# EAGLE board LinCorrector2.old (EAGLE 7.4.0)
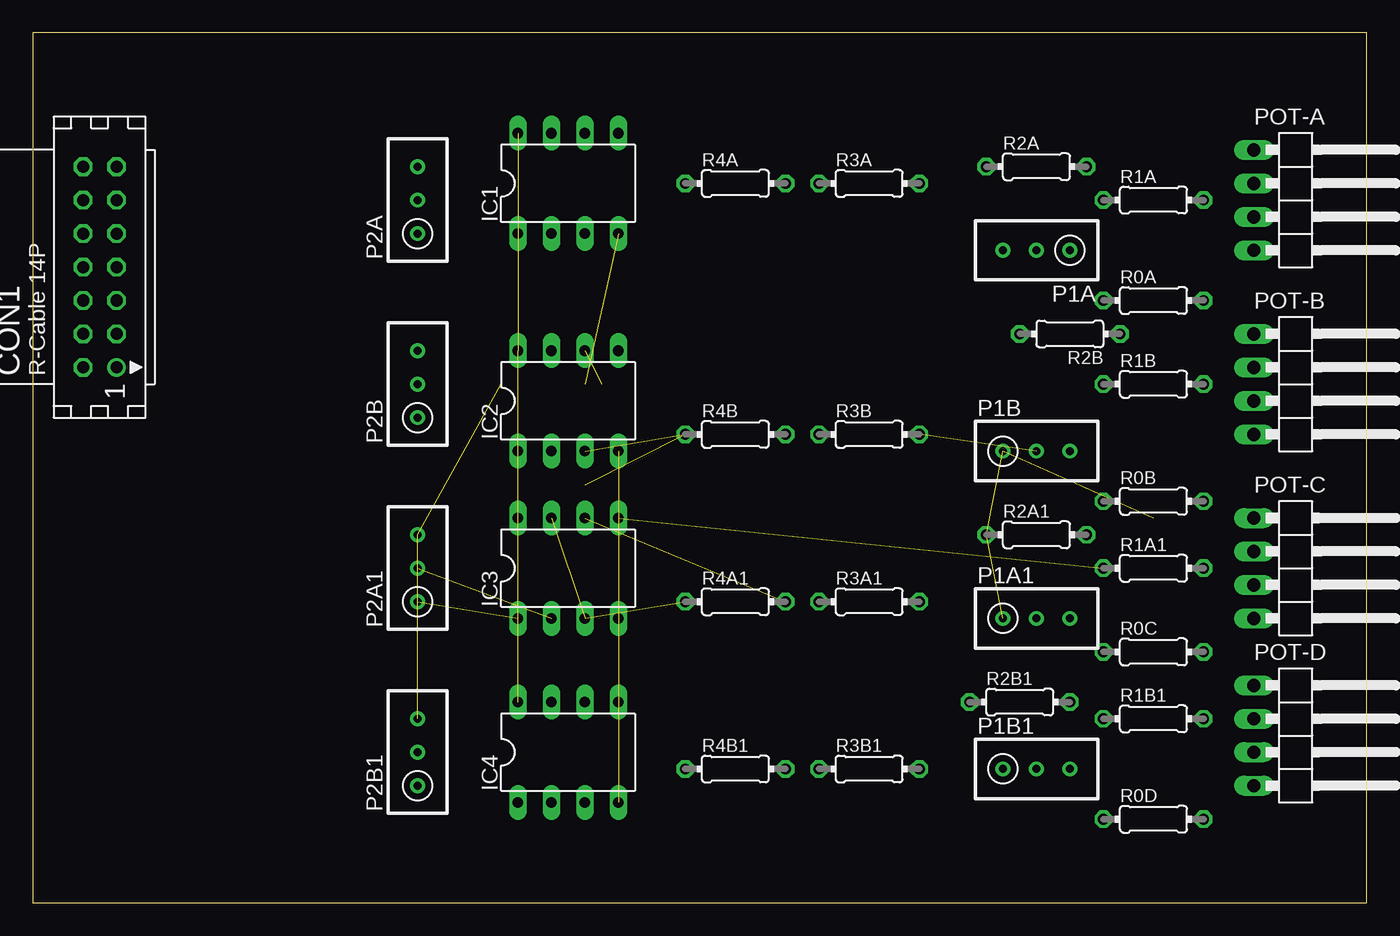
[diagram p0: board, top side]
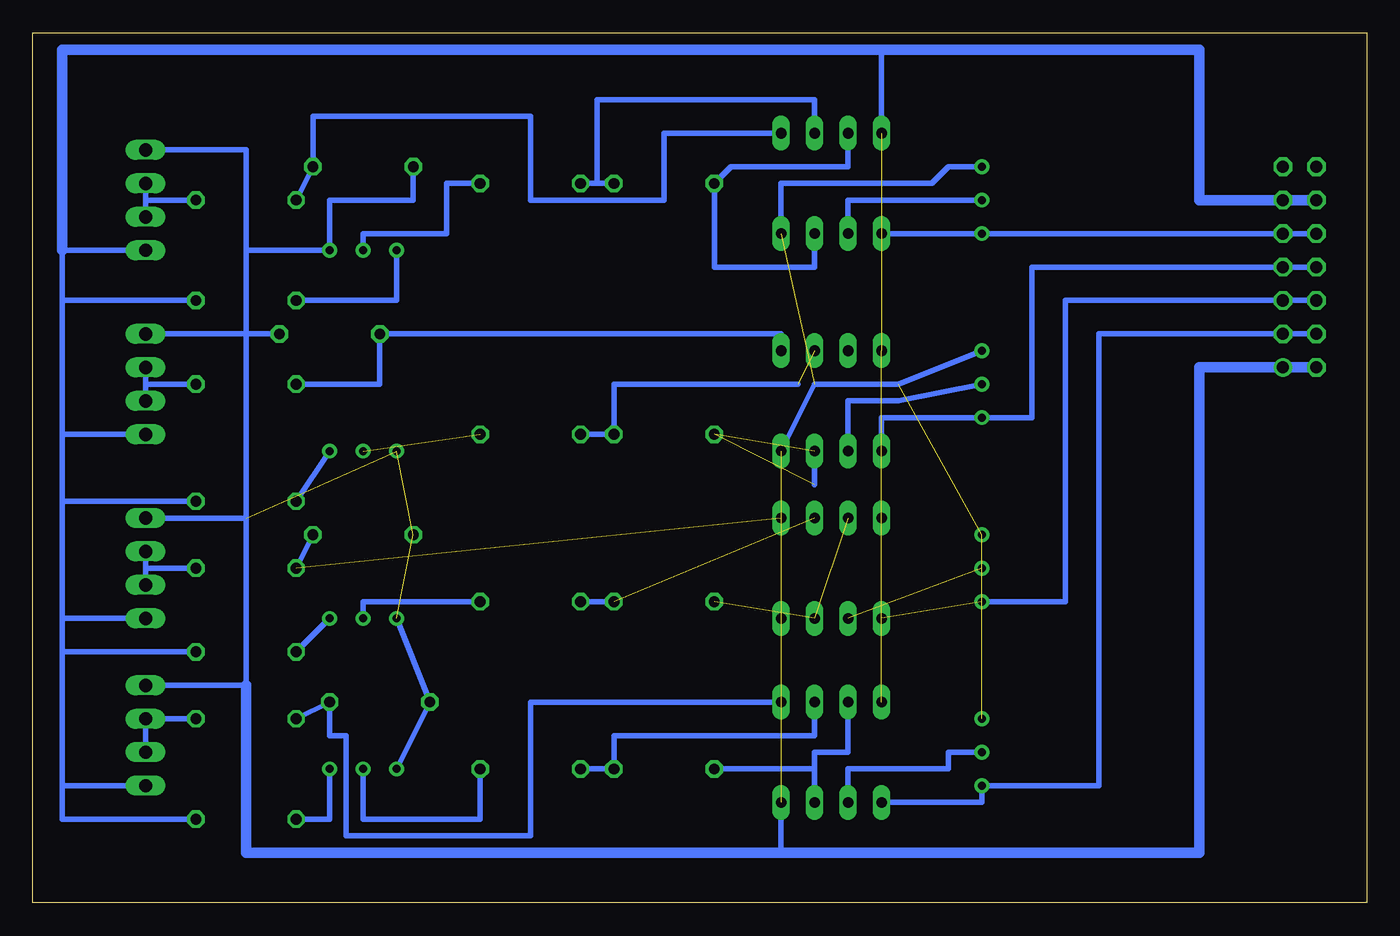
[diagram p1: board, bottom side, seen from below]

Size 101.27 x 66.03 mm. Coordinates in mm from the lower left corner, seen from the top.
Outline: 0,0 101.27,0 101.27,66.03 0,66.03 0,0
Copper layers (1*16): Top 0.035mm / dielectric 1.5mm / Bottom 0.035mm
Design rules "default": minimum track width 10mil, minimum drill 24mil, track to track 8mil, track to pad 8mil, pad to pad 8mil, via to via 8mil, smd to smd 8mil, copper to edge 40mil, drill to drill 8mil, minimum pad ring 10mil, minimum via ring 8mil, stop-mask expansion 4mil, vias tented up to drill 0mil, thermal gap 10mil
Net classes: 0 default: width 0.381 mm, drill 0.508 mm, clearance 0.381 mm

## Footprints (pad centres in the part's own frame; a part is rotated, then mirrored left to right if it is on the bottom)
CON14 = drill 0.914: 1 -7.62,-1.27 | drill 0.914 octagon: 2 -7.62,1.27; 3 -5.08,-1.27; 4 -5.08,1.27; 5 -2.54,-1.27; 6 -2.54,1.27; 7 0,-1.27; 8 0,1.27; 9 2.54,-1.27; 10 2.54,1.27; 11 5.08,-1.27; 12 5.08,1.27; 13 7.62,-1.27; 14 7.62,1.27
DIP-8 = drill 0.813 long: 1 -3.81,-3.81; 2 -1.27,-3.81; 3 1.27,-3.81; 4 3.81,-3.81; 5 3.81,3.81; 6 1.27,3.81; 7 -1.27,3.81; 8 -3.81,3.81
RTRIM3296W = drill 0.61: 1 0,-2.54; 2 0,0; 3 0,2.54
1X04/90 = drill 1.016 long: 1 -3.81,-3.81; 2 -1.27,-3.81; 3 1.27,-3.81; 4 3.81,-3.81
0204/7 = drill 0.813 octagon: 1 -3.81,0; 2 3.81,0

## Placement (x,y rotation side)
CON1  [CON14]  5.08,48.26 90 top
IC1  MCP6002DIP  [DIP-8]  40.64,54.61 0 top
IC2  MCP6002DIP  [DIP-8]  40.64,38.1 0 top
IC3  MCP6002DIP  [DIP-8]  40.64,25.4 0 top
IC4  MCP6002DIP  [DIP-8]  40.64,11.43 0 top
P1A  500k  [RTRIM3296W]  76.2,49.53 90 top
P1A1  500k  [RTRIM3296W]  76.2,21.59 270 top
P1B  500k  [RTRIM3296W]  76.2,34.29 270 top
P1B1  500k  [RTRIM3296W]  76.2,10.16 270 top
P2A  500k  [RTRIM3296W]  29.21,53.34 0 top
P2A1  500k  [RTRIM3296W]  29.21,25.4 0 top
P2B  500k  [RTRIM3296W]  29.21,39.37 0 top
P2B1  500k  [RTRIM3296W]  29.21,11.43 0 top
POT-A  [1X04/90]  96.52,53.34 270 top
POT-B  [1X04/90]  96.52,39.37 270 top
POT-C  [1X04/90]  96.52,25.4 270 top
POT-D  [1X04/90]  96.52,12.7 270 top
R0A  0  [0204/7]  85.09,45.72 0 top
R0B  0  [0204/7]  85.09,30.48 0 top
R0C  0  [0204/7]  85.09,19.05 0 top
R0D  0  [0204/7]  85.09,6.35 0 top
R1A  10k  [0204/7]  85.09,53.34 0 top
R1A1  10k  [0204/7]  85.09,25.4 0 top
R1B  10k  [0204/7]  85.09,39.37 0 top
R1B1  10k  [0204/7]  85.09,13.97 0 top
R2A  10k  [0204/7]  76.2,55.88 0 top
R2A1  10k  [0204/7]  76.2,27.94 0 top
R2B  10k  [0204/7]  78.74,43.18 180 top
R2B1  10k  [0204/7]  74.93,15.24 0 top
R3A  10k  [0204/7]  63.5,54.61 0 top
R3A1  10k  [0204/7]  63.5,22.86 0 top
R3B  10k  [0204/7]  63.5,35.56 0 top
R3B1  10k  [0204/7]  63.5,10.16 0 top
R4A  10k  [0204/7]  53.34,54.61 0 top
R4A1  10k  [0204/7]  53.34,22.86 0 top
R4B  10k  [0204/7]  53.34,35.56 0 top
R4B1  10k  [0204/7]  53.34,10.16 0 top

## Library data of the parts
CON1 = con-harting; OC_FARNELL: unknown; OC_NEWARK: unknown
IC1-IC4 = adam - ics
P1A P1A1 P1B P1B1 P2A P2A1 P2B P2B1 R0A R0B R0C R0D = resistor
POT-A POT-B POT-C POT-D = pinhead
R1A R1A1 R1B R1B1 R2A R2A1 R2B R2B1 R3A R3A1 R3B R3B1 R4A R4A1 R4B R4B1 = rcl

## Nets
GND: CON1.1 CON1.2 IC1.4 IC2.4 IC3.4 IC4.4 P1A1.1 P1A.1 P1B1.1 P1B.1 P2A1.3 P2A.3 P2B1.3 P2B.3 POT-A.1 POT-B.1 POT-C.1 POT-D.1 R2A1.1 R2A.1 R2B1.1 R2B.1
N$1: IC1.5 R1A.1 R2A.2
N$2: POT-A.2 POT-A.3 R1A.2
N$3: P1A.2 R3A.2
N$4: IC1.6 R3A.1 R4A.2
N$5: IC1.3 IC1.7 R4A.1
N$6: IC2.5 R1B.1 R2B.2
N$7: IC1.2 P2A.2
N$8: CON1.9 CON1.10 IC1.1 P2A.1
N$9: P1B.2 R3B.2
N$10: IC2.6 R3B.1 R4B.2
N$11: IC2.3 IC2.7 R4B.1
N$12: IC2.2 P2B.2
N$13: CON1.7 CON1.8 IC2.1 P2B.1
N$14: POT-B.2 POT-B.3 R1B.2
N$15: IC3.5 R1A1.1 R2A1.2
N$16: P1A1.2 R3A1.2
N$17: IC3.6 R3A1.1 R4A1.2
N$18: IC3.3 IC3.7 R4A1.1
N$19: IC3.2 P2A1.2
N$20: CON1.5 CON1.6 IC3.1 P2A1.1
N$21: POT-C.2 POT-C.3 R1A1.2
N$22: IC4.5 R1B1.1 R2B1.2
N$23: P1B1.2 R3B1.2
N$24: IC4.6 R3B1.1 R4B1.2
N$25: IC4.3 IC4.7 R4B1.1
N$26: IC4.2 P2B1.2
N$27: P1A.3 R0A.1
N$28: POT-D.2 POT-D.3 R1B1.2
N$29: CON1.3 CON1.4 IC4.1 P2B1.1
N$30: P1B.3 R0B.1
N$31: P1A1.3 R0C.1
N$32: P1B1.3 R0D.1
VCC: CON1.11 CON1.12 IC1.8 IC2.8 IC3.8 IC4.8 POT-A.4 POT-B.4 POT-C.4 POT-D.4 R0A.2 R0B.2 R0C.2 R0D.2

## Tracks (layer width: path | path; a pad name or v marks a point on that pad's centre or on a via)
GND  (8 unrouted)
  Bottom 0.406: POT-A.1 85.09,57.15 85.09,49.53 | 85.09,49.53 85.09,43.18 | 85.09,43.18 85.09,29.21 | 85.09,29.21 85.09,16.51 POT-D.1 | POT-C.1 85.09,29.21 | POT-B.1 85.09,43.18 | P2A.3 31.75,55.88 33.02,54.61 44.45,54.61 IC1.4 | R2A.1 72.39,53.34 78.74,53.34 P1A.1 85.09,49.53 | R2B.1 85.09,43.18 | IC4.4 44.45,3.81 | P1B1.1 R2B1.1 P1A1.1 | P2B.3 35.56,39.37 41.91,39.37 IC2.4
  Bottom 0.813: CON1.2 CON1.1 12.7,40.64 12.7,3.81 44.45,3.81 85.09,3.81 85.09,16.51
N$1
  Bottom 0.406: R1A.1 R2A.2 80.01,59.69 63.5,59.69 63.5,53.34 53.34,53.34 53.34,58.42 IC1.5
N$2
  Bottom 0.406: POT-A.3 92.71,53.34 | 92.71,53.34 POT-A.2 | R1A.2 92.71,53.34
N$3
  Bottom 0.406: R3A.2 69.85,54.61 69.85,50.8 76.2,50.8 P1A.2
N$4
  Bottom 0.406: R4A.2 58.42,54.61 | 58.42,54.61 R3A.1 | IC1.6 41.91,60.96 58.42,60.96 58.42,54.61
N$5
  Bottom 0.406: IC1.7 39.37,55.88 48.26,55.88 R4A.1 49.53,48.26 41.91,48.26 IC1.3
N$6
  Bottom 0.406: R1B.1 74.93,39.37 R2B.2 44.45,43.18 IC2.5
N$7
  Bottom 0.406: IC1.2 39.37,53.34 P2A.2
N$8
  Bottom 0.406: IC1.1 P2A.1 CON1.9 CON1.10
N$9  (1 unrouted)
N$10  (1 unrouted)
  Bottom 0.406: R3B.1 R4B.2 57.15,39.37 43.18,39.37
N$11  (2 unrouted)
  Bottom 0.406: IC2.3 41.91,31.75
N$12
  Bottom 0.406: IC2.2 39.37,38.1 35.56,38.1 P2B.2
N$13
  Bottom 0.406: CON1.8 CON1.7 25.4,48.26 25.4,36.83 P2B.1 36.83,36.83 IC2.1
N$14
  Bottom 0.406: POT-B.2 POT-B.3 92.71,39.37 R1B.2
N$15  (1 unrouted)
  Bottom 0.406: R1A1.1 R2A1.2
N$16
  Bottom 0.406: R3A1.2 76.2,22.86 P1A1.2
N$17  (1 unrouted)
  Bottom 0.406: R3A1.1 R4A1.2
N$18  (2 unrouted)
N$19  (1 unrouted)
N$20  (1 unrouted)
  Bottom 0.406: CON1.6 CON1.5 22.86,45.72 22.86,22.86 P2A1.1
N$21
  Bottom 0.406: POT-C.2 92.71,25.4 | 92.71,25.4 POT-C.3 | R1A1.2 92.71,25.4
N$22
  Bottom 0.406: R1B1.1 R2B1.2 78.74,12.7 77.47,12.7 77.47,5.08 63.5,5.08 63.5,15.24 IC4.5
N$23
  Bottom 0.406: P1B1.2 76.2,6.35 67.31,6.35 R3B1.2
N$24
  Bottom 0.406: R3B1.1 R4B1.2 57.15,12.7 41.91,12.7 IC4.6
N$25
  Bottom 0.406: IC4.3 41.91,10.16 | 41.91,10.16 R4B1.1 | IC4.7 39.37,11.43 41.91,11.43 41.91,10.16
N$26
  Bottom 0.406: P2B1.2 31.75,11.43 31.75,10.16 39.37,10.16 IC4.2
N$27
  Bottom 0.406: R0A.1 73.66,45.72 P1A.3
N$28
  Bottom 0.406: POT-D.3 POT-D.2 R1B1.2
N$29
  Bottom 0.406: CON1.4 CON1.3 20.32,43.18 20.32,8.89 P2B1.1 29.21,7.62 IC4.1
N$30
  Bottom 0.406: R0B.1 P1B.3
N$31
  Bottom 0.406: R0C.1 P1A1.3
N$32
  Bottom 0.406: R0D.1 78.74,6.35 P1B1.3
VCC  (3 unrouted)
  Bottom 0.406: POT-A.4 99.06,49.53 99.06,45.72 | 99.06,45.72 99.06,35.56 | 99.06,35.56 POT-B.4 | POT-D.4 99.06,8.89 | 99.06,8.89 99.06,19.05 | 99.06,19.05 99.06,21.59 | 99.06,21.59 99.06,30.48 | 99.06,30.48 99.06,35.56 | POT-C.4 99.06,21.59 | IC1.8 36.83,64.77 | R0A.2 99.06,45.72 | R0B.2 99.06,30.48 | R0C.2 99.06,19.05 | R0D.2 99.06,6.35 99.06,8.89
  Bottom 0.813: CON1.12 CON1.11 12.7,53.34 12.7,64.77 36.83,64.77 99.06,64.77 99.06,49.53